# Altium PCB PCB1.PcbDoc
Units mm, origin at the board's own origin, x right, y up, seen from the top; angles counter-clockwise.
Board outline 116.84 x 100.22 mm, 2 copper layers (Top Layer, Bottom Layer); 27 components, 16 nets, 99 pads, 4 vias.
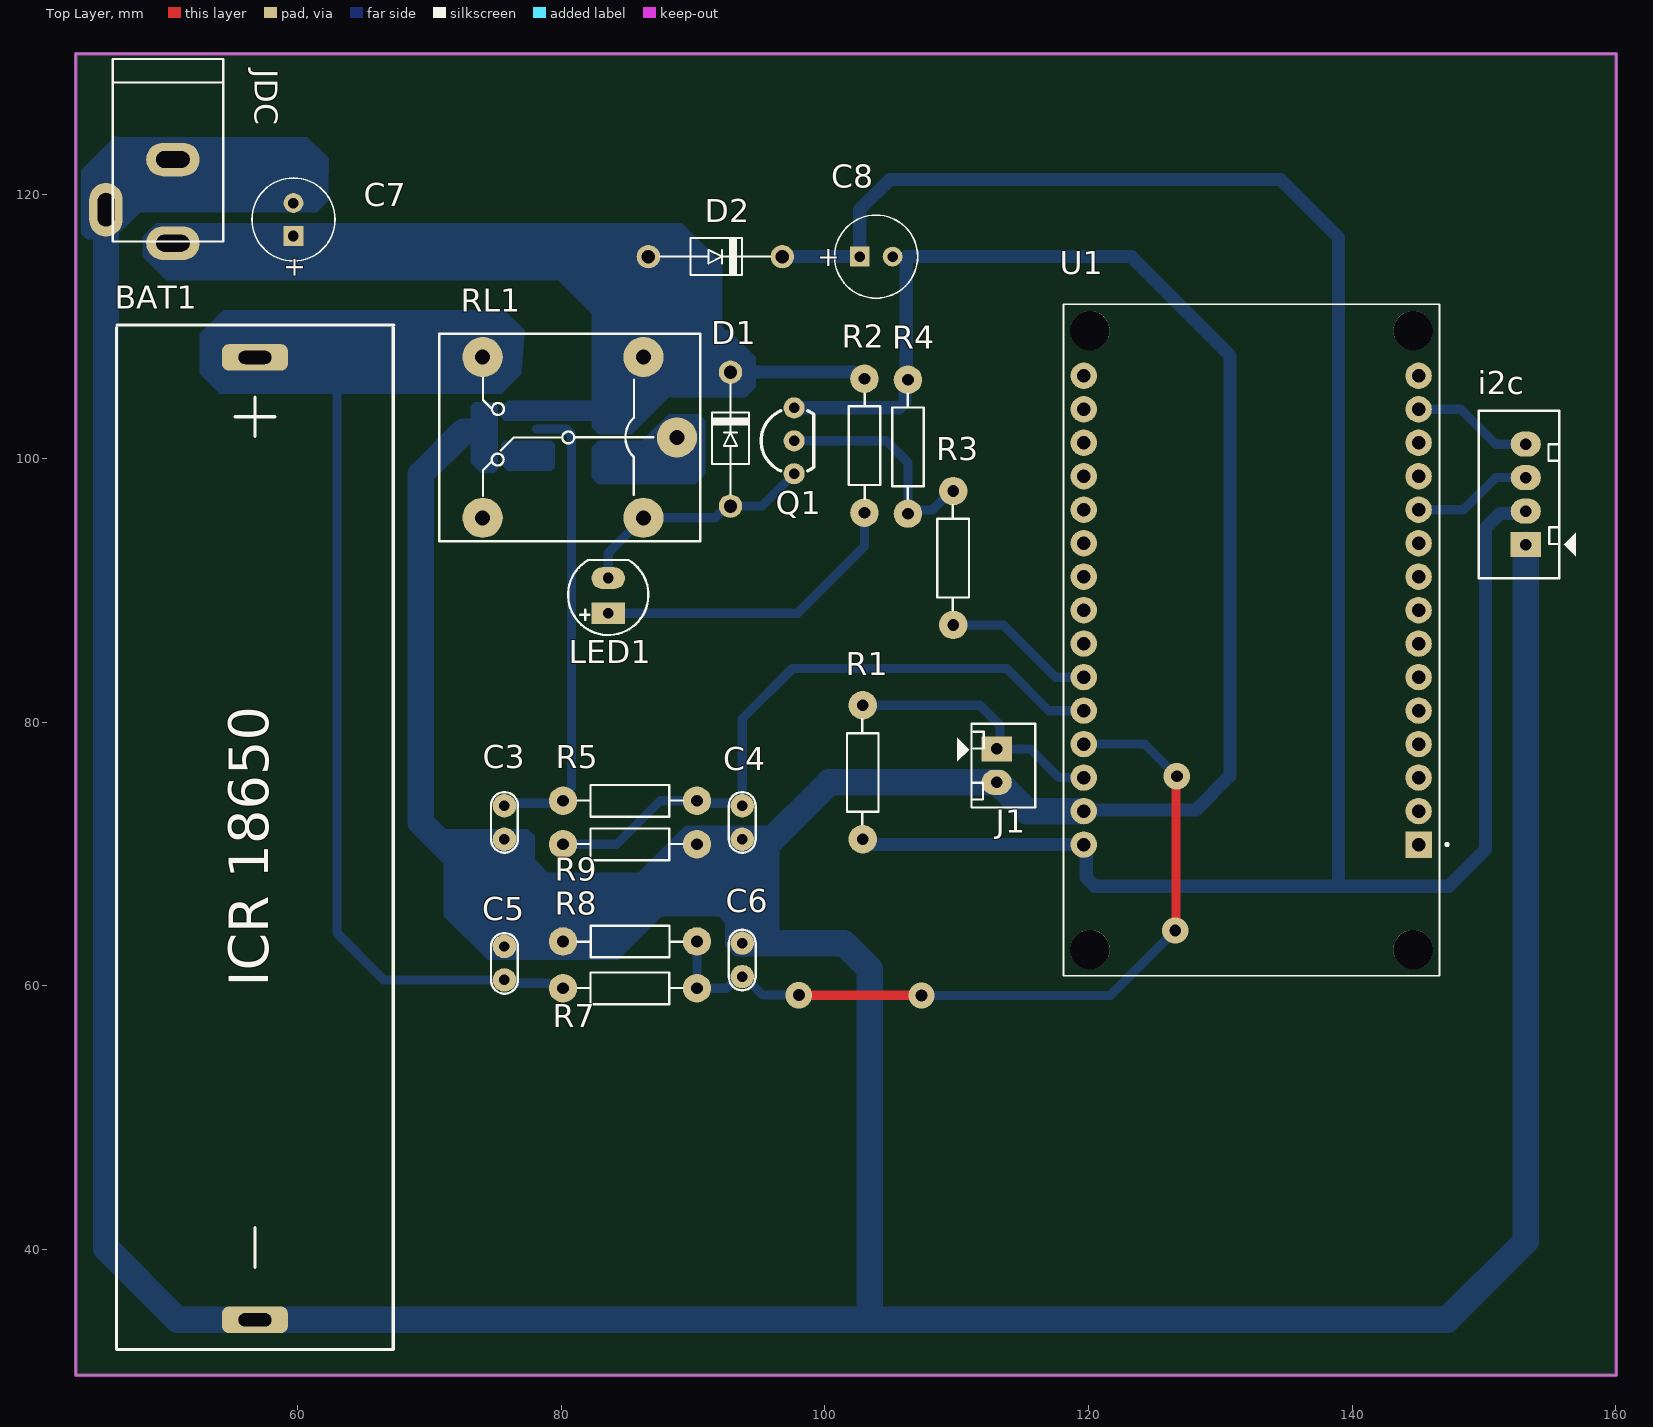
[diagram p0: Top Layer view]
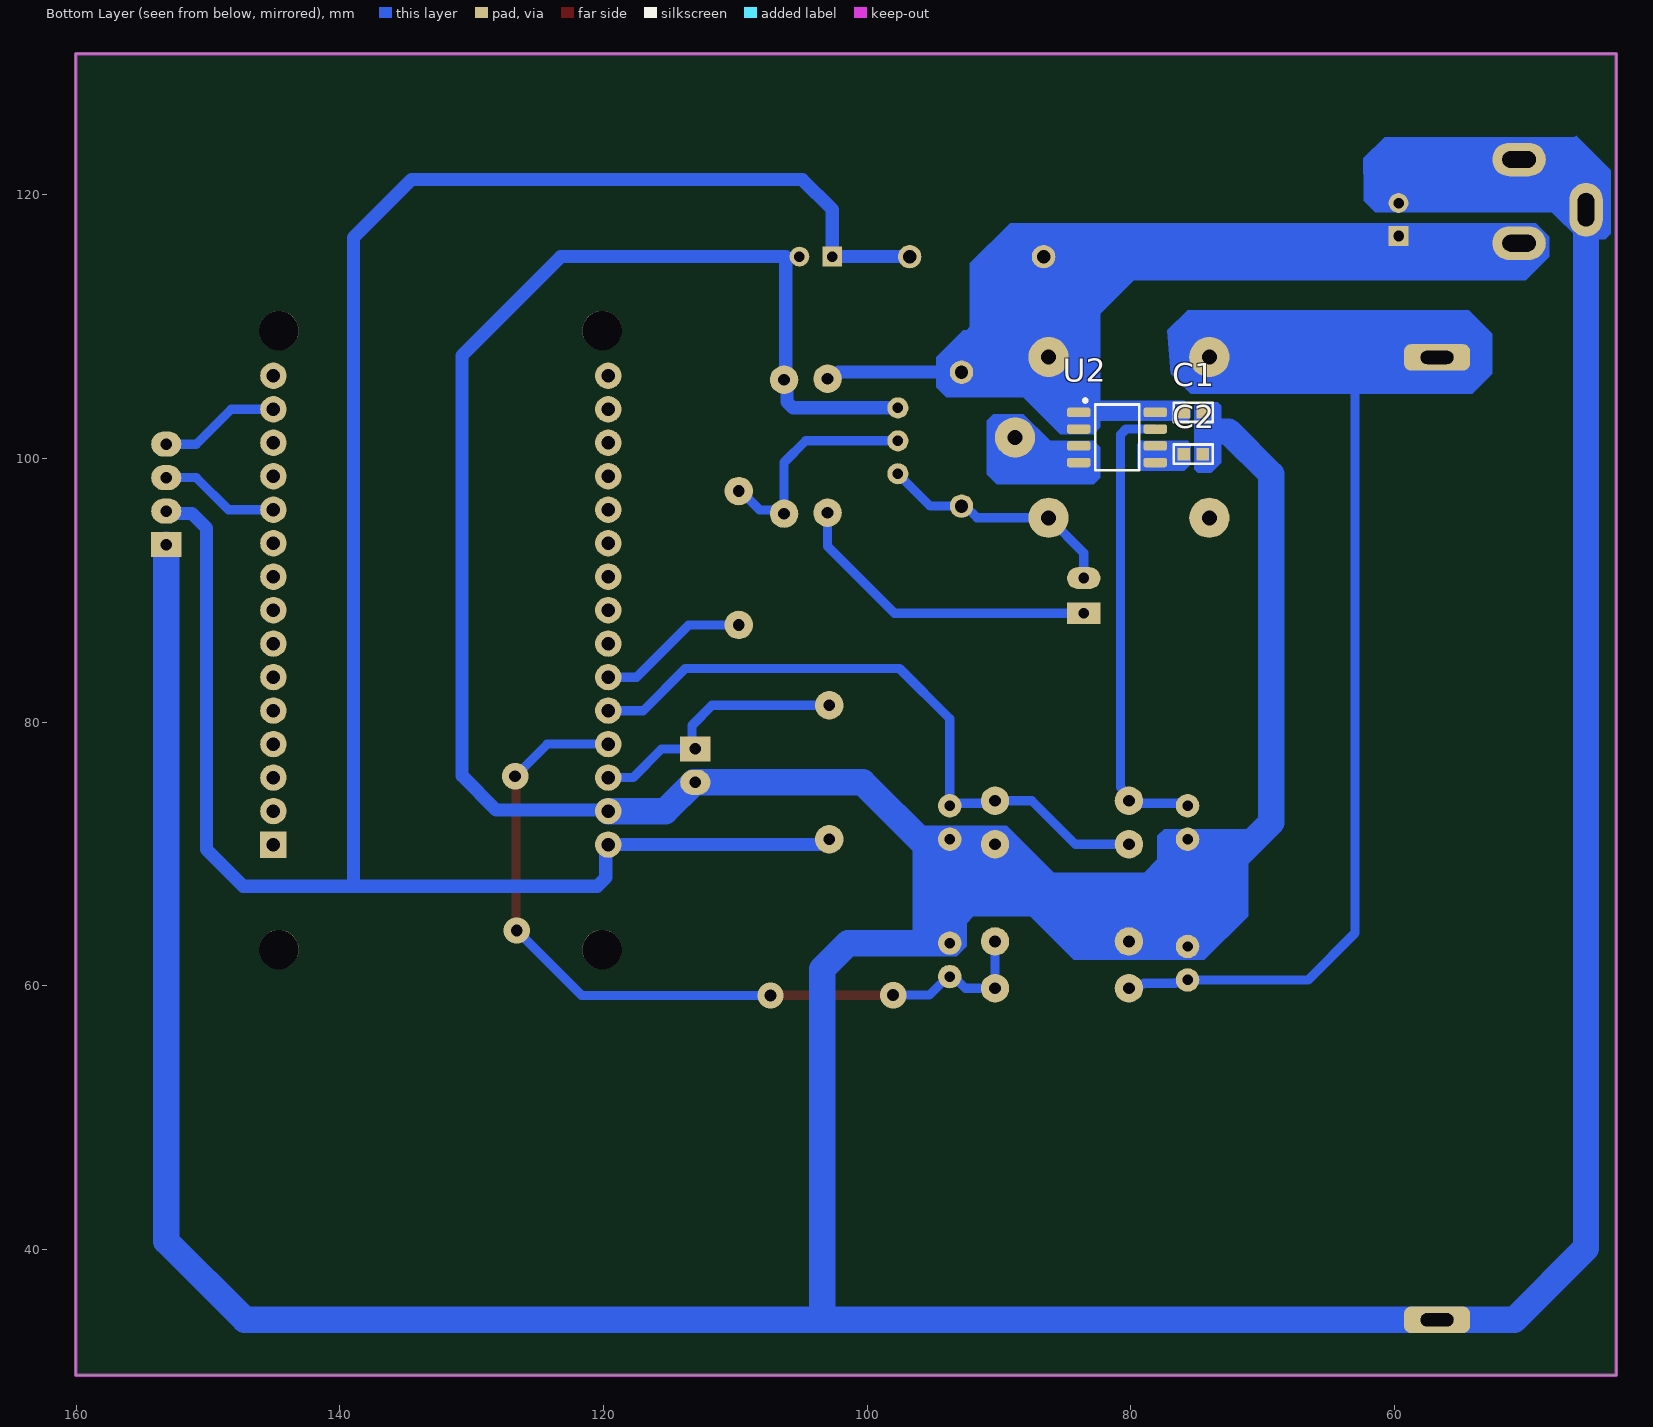
[diagram p1: Bottom Layer view, seen from below]
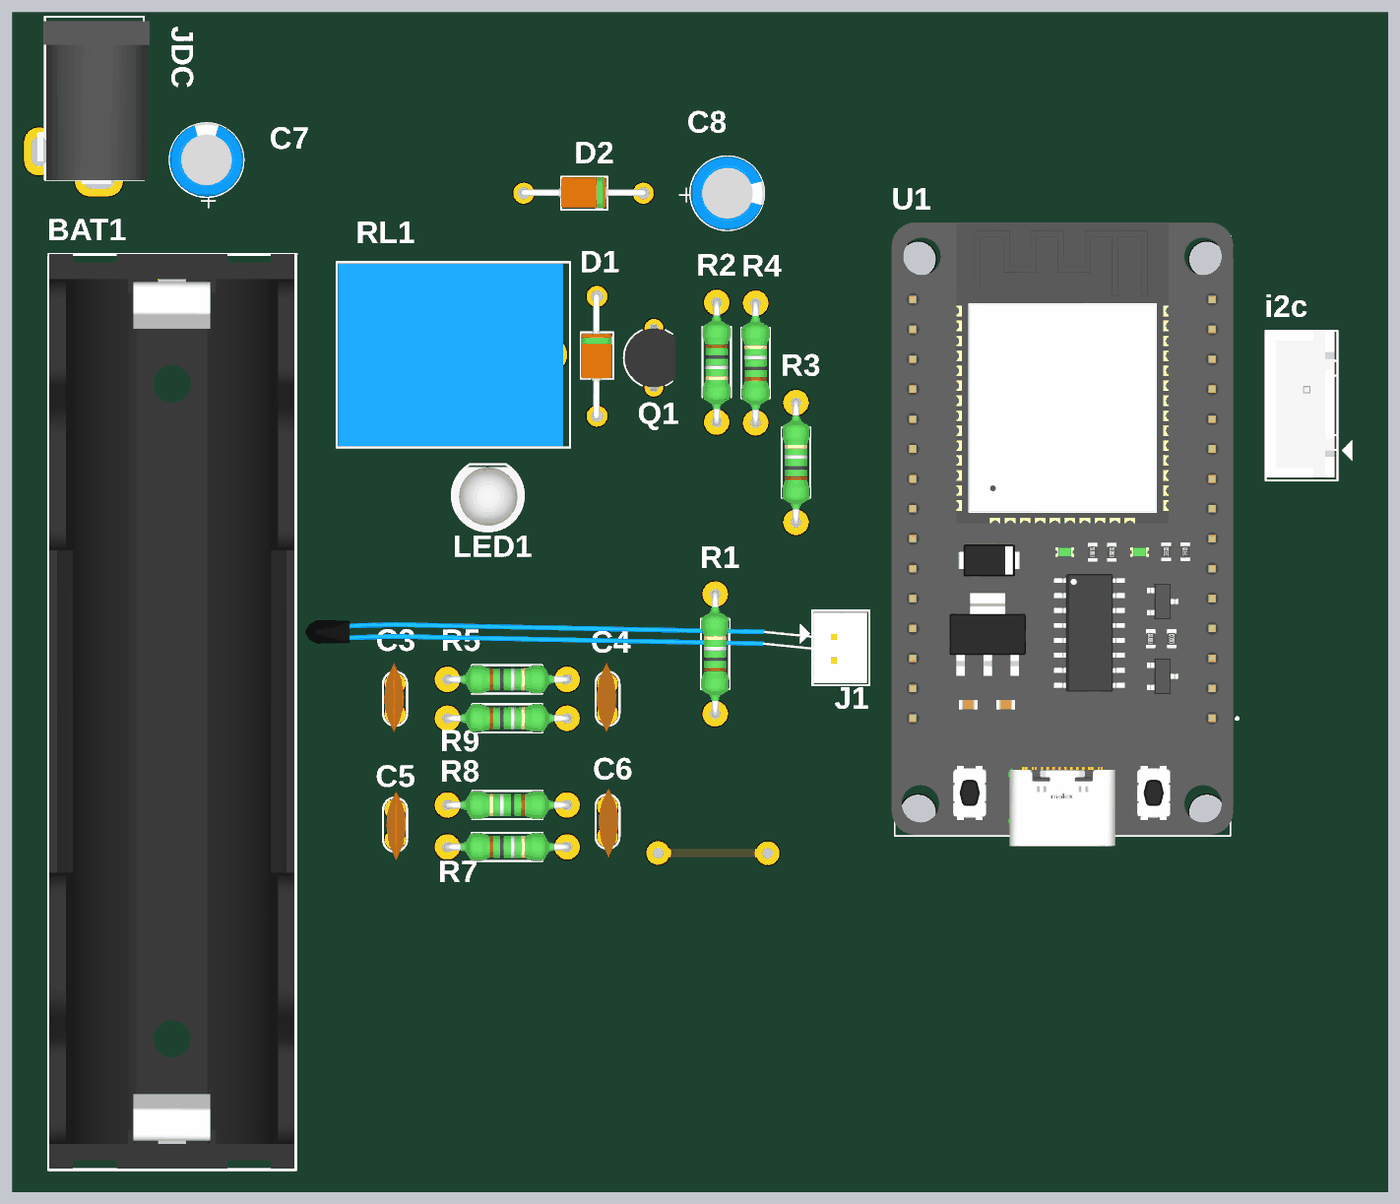
[diagram p2: 3D render of the assembled board from above, using the file's embedded part models]
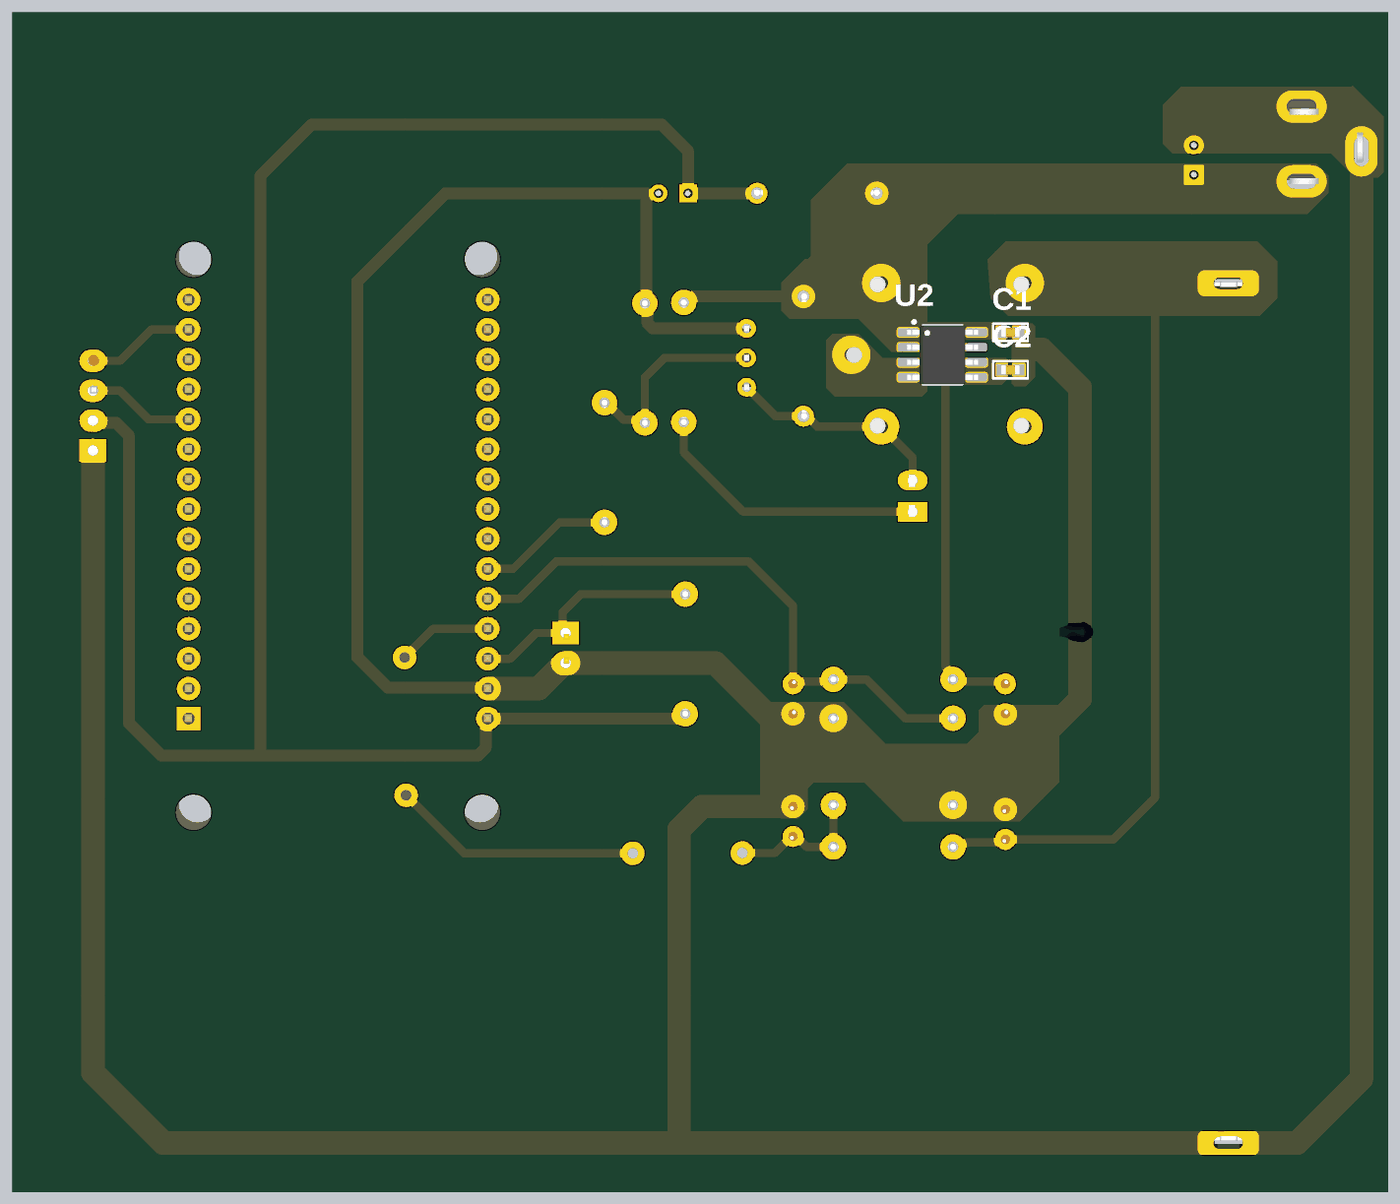
[diagram p3: 3D render of the assembled board from below, using the file's embedded part models]

## Layer stack, top to bottom
Top Solder: solder mask 0.0102, Solder Resist, Dk 3.5
Top Layer: signal copper 0.0356
Dielectric 1: dielectric 0.32, FR-4, Dk 4.8
Bottom Layer: signal copper 0.0356
Bottom Solder: solder mask 0.0102, Solder Resist, Dk 3.5

## Board outline
43.18,30.48 43.18,130.7 160.02,130.7 160.02,30.48

## Design rules (kind name [scope] priority, off if disabled: settings)
Clearance [All] p1: gap=0.254 ignorepadtopadclearanceinfootprint=FALSE except(0: Arc-Hole Track-Hole SMDPad-Hole THPad-Hole Via-Hole Fill-Hole Poly-Hole Region-Hole Text-Hole)
PolygonConnect [All] p1: connectstyle=Relief reliefconductorwidth=0.254 reliefentries=4 polygonreliefangle="90 Angle" airgapwidth=0.254
RoutingVias [All] p1: holewidth=0.711 width=1.27 viastyle="Through Hole" minholewidth=0.711 minwidth=1.27 maxholewidth=0.711 maxwidth=1.27
SolderMaskExpansion [All] p1: expansion=0.102 istentingtop=FALSE
Width [All] p1: maxlimit=2 minlimit=0.7 preferedwidth=1
30 further rules are at their usual default settings.

## Components (designator, comment, footprint, x,y, rotation, side; value= is the part's Value field where it differs from the comment)
BAT1 "SOCKET_18650" SOCKET_18650_1PIN 46.269,32.421 r0 top
C1 "0.1uF" CAPC_0603_N 75.259,103.505 r0 bottom
C2 "1nF" CAPC_0603_N 75.259,100.33 r0 bottom value=0.1uF
C3 "1uF" CN1 75.692,71.12 r90 top value=100pF
C4 "0.1uF" CN1 93.726,71.12 r90 top value=100pF
C5 "1uF" CN1 75.692,62.992 r270 top value=100pF
C6 "0.1uF" CN1 93.726,63.246 r270 top value=100pF
C7 "100uF" CA-ALU-6.3 59.69,118.13 r90 top value=104
C8 "100uF" CA-ALU-6.3 103.886,115.316 r0 top value=104
D1 "Diode" DIO-1A 92.837,96.393 r90 top value=1N5007
D2 "Diode" DIO-1A 86.614,115.316 r0 top value=1N5007
i2c "Header4" Header4 153.162,93.472 r90 top
J1 "NTC Thermistor" "NTC Thermistor" 113.03,76.708 r270 top
JDC "Jac DC" DC0 48.006,119.507 r270 top
LED1 "LED" LED-5-Green 83.566,88.392 r90 top value="LED 3 ly Single Colour"
Q1 "BC547" TO-92 97.663,101.346 r90 top
R1 "10k" RES-1/4W 102.743,75.819 r270 top
R2 "Res" RES-1/4W 103.124,101.346 r90 top
R3 "1k" RES-1/4W 109.601,92.075 r270 top
R4 "10k" RES-1/4W 106.172,100.52 r270 top
R5 "1k" RES-1/4W 84.836,74.168 r180 top
R7 "100k" RES-1/4W 84.836,59.944 r180 top
R8 "100k" RES-1/4W 85.598,63.246 r0 top
R9 "2k" RES-1/4W 84.836,70.866 r180 top
RL1 "Relay 10A/12V" "RELAY 5" 80.518,101.6 r180 top value="Relay SPDT, 10A, 12V"
U1 "ESP32-DEVKIT-V1" ESP32-DEVKIT-V1 132.08,85.852 r180 top locked
U2 "ACS712" ACS712 80.899,101.346 r180 bottom

## Footprints (in the part's own frame and the unit in brackets; to place one, negate y for a bottom-side part, rotate by r counter-clockwise, add the part's x,y. Pads: shape width x height; smd on the part's side, far side on the other; paste and mask are expansions set on the pad)
ACS712 [mm] "5A SOIC-8 Current Sensors ROHS"
  rrect50% 1.78x0.72 smd: 1(-3.048,2.154) 2(-3.048,0.889) 3(-3.048,-0.381) 4(-3.048,-1.651) 5(2.754,-1.651) 6(2.754,-0.381) 7(2.754,0.889) 8(2.754,2.159)
  silkscreen extent -2.68,-2.25 1.55,3.18, body extent -3.14,-2.25 2.89,2.75, height 1.44
CA-ALU-6.3 [mm] "Polarized capacitors, Aluminum Electrolytic Capacitors, 2-Leads, Body 6.3x15x2.5x0.5"
  rect 1.5x1.5 hole 0.8: 1(-1.25,0)
  round 1.5 hole 0.8: 2(1.25,0)
  silkscreen extent -3.15,-3.15 3.15,3.15, body extent -3.12,-3.15 3.18,3.15, height 11
CAPC_0603_N [mm]
  rrect2% 0.95x0.97 smd: 1(-0.71,0) 2(0.71,0)
  silkscreen extent -1.47,-0.74 1.47,0.74, body extent -0.8,-0.4 0.8,0.4, height 0.8
CN1 [mil]
  round 70 hole 31: 1(0,0) 2(100,0)
  silkscreen extent -40,-40 141,40, body extent -60,-30 170,37, height 265
DC0 [mil] "Jac DC input"
  oval 100x160 hole 50 slot 100 at 90 deg: 1(125,100) 2(-125,100)
  oval 160x100 hole 50 slot 100 at 0 deg: 3(25,-100)
  silkscreen extent -425,-80 120,250, body extent -410,-105 134,269, height 434
DIO-1A [mil]
  round 70 hole 40: 1(0,0) 2(400,0)
  silkscreen extent 35,-55 365,55, body extent -11,-50 411,54, height 102
ESP32-DEVKIT-V1 [mm] "ESP32-DEVKIT-V1 30Pin"
  round 2 hole 1.02: 1(12.446,-20.426) 2(12.446,-17.886) 3(12.446,-15.346) 4(12.446,-12.806) 5(12.446,-10.266) 6(12.446,-7.726) 7(12.446,-5.186) 8(12.446,-2.646) 9(12.446,-0.106) 10(12.446,2.434) 11(12.446,4.974) 12(12.446,7.514) 13(12.446,10.054) 14(12.446,12.594) 15(12.446,15.134) 17(-12.954,12.594) 18(-12.954,10.054) 19(-12.954,7.514) 20(-12.954,4.974) 21(-12.954,2.434) 22(-12.954,-0.106) 23(-12.954,-2.646) 24(-12.954,-5.186) 25(-12.954,-7.726) 26(-12.954,-10.266) 27(-12.954,-12.806) 28(-12.954,-15.346) 29(-12.954,-17.886) 30(-12.954,-20.426)
  rect 2x2 / inner round 2 / far side rect 2x2 hole 1.02: 16(-12.954,15.134)
  round 3 hole 3 unplated: ""(-12.534,23.094) ""(-12.534,-23.856) ""(11.976,23.094) ""(11.976,-23.856)
  silkscreen extent -15.2,-25.86 13.98,25.09, body extent -14.78,-26.99 14.22,25.97, height 7.86
Header4 [mil] "CON4"
  rect 75x90 hole 34: 1(0,0)
  oval 75x90 hole 34: 2(100,0) 3(200,0) 4(300,0)
  silkscreen extent -100,-150 400,140, body extent -90,-90 398,136, height 276
LED-5-Green [mil] "LED 2 PIN, 5 ly , Only colour,pin to pin 100mil"
  rect 65x100 hole 32: 1(-5,0)
  oval 65x100 hole 32: 2(100,0)
  silkscreen extent -70,-120 154,120, body extent -69,-120 145,117, height 339
"NTC Thermistor" [mil] "NTC Thermistor"
  rect 75x90 hole 34: 1(-50,0)
  oval 75x90 hole 34: 2(50,0)
  silkscreen extent -125,-118 125,115, body extent -118,-1771 118,107, height 236
"RELAY 5" [mil] "Reley DPDT, 8 pin, 1A, W400mil, L800mil,H 300mil"
  round 120 hole 45: 1(-325,0) 2(255,240) 3(255,-240) 4(-225,-240) 5(-225,240)
  silkscreen extent -395,-310 385,310, body extent -371,-304 381,306, height 602
RES-1/4W [mil]
  round 85 hole 35: 1(-215,5) 2(185,5)
  silkscreen extent -173,-42 141,52, body extent -227,-42 197,52, height 95
SOCKET_18650_1PIN [mm]
  rrect50% 5x2 hole 1 slot 2.5 at 0 deg: 1(10.5,75.25) 2(10.5,2.25)
  silkscreen extent 0,0 21.04,77.71, body extent 0.08,0.07 20.88,77.73, height 21.65
TO-92 [mm]
  round 1.6 hole 0.8 mask+0.1: 1(-2.5,0) 2(0,0) 3(2.5,0)
  silkscreen extent -2.28,-1.5 2.28,2.5, body extent -2.75,-1.86 2.75,2.5, height 9.2

## Part data
BAT1: library part SOCKET_18650_1PIN
C1 C2: library part C0603X7R104K500NT, "CAP CER 0.1UF 50V X7R 0603", Detailed Value="0.1uF - 50V - 0603", Manufacture=Hottech, Category=Capacitor, Creator=ThangND, Mounting type=SMD, PartNumber=C0603X7R104K500NT, PROJECT=KHO
C3 C4 C5 C6: library part CN1, "Cap np  1pF - 472pF"
C7 C8: library part CN-ALU-DIP, "Capacitor (Semiconductor SIM Model)", LatestRevisionDate=17-Jul-2002, LatestRevisionNote="Re-released for DXP Platform.", PackageReference=C1206, Publisher="Altium Limited"
D1 D2: "Default Diode", Code - JEDEC=DO-214-AB, Published=8-Jun-2000, Publisher="Altium Limited", Revision="July-2002: Re-released for DXP Platform."
i2c: "Header IDC, 4 x 1 Pin Vertical 2.54mm Pitch (Non-Boxed, Male)", Manufacturer="W¨¹rth Elektronik eiSos GmbH", partNo=613002143121, ComponentLink1 Description=Manufacturer, ComponentLink1URL=http://www.we-online.com, ComponentLink2 Description=Datasheet, ComponentLink2URL=http://katalog.we-online.de/em/datasheet/6130xx143121.pdf, Created by="Karrer Zheng", Created Date="29 March 2013", NoPins=02
JDC: library part DCIN, "Jac DC input"
LED1: "LED Single colour Green and Red"
Q1: "Transistors - BJT NPN 45V 100mA", DataSheet=https://www.mouser.vn/datasheet/2/308/1/BC550_D-2310266.pdf
R1 R3 R4 R5 R7 R8 R9: library part Res, "Res", Manufacturer="Generic Components", Class=Passive, Published=08/06/2000, Publisher="Altium Hobart Technology Centre", SubClass=R
R2: Manufacturer="Generic Components", Class=Passive, Published=08/06/2000, Publisher="Altium Hobart Technology Centre", SubClass=R
RL1: library part "Relay 5", "Relay SPDT,10A - 12VDC 5 Pin"
U1: "ESP32-DEVKIT-V1 30Pin"
U2: "5A SOIC-8 Current Sensors ROHS"

## Via types
v1: diameter 2, hole 0.9, Top Layer to Bottom Layer, 4 vias

## Nets (pads, with @x,y where several pads share a name; then routed paths per layer and width w, separated by ;. In a path a pad name is that pad's centre, name@x,y a point inside that pad or via, vN(x,y) a via of type N, cw(c..) or ccw(c..) an arc to the next point about the centre after c; other vN are vias at no path point)
+5: C8.1 D2.2 i2c.2 R1.2 U1.15 | length 176.9
  Bottom Layer w1: D2.2 C8.1 102.636,118.892 104.902,121.158 134.567,121.158 138.95,116.775 138.95,67.564 ; R1.2 103.184,71.12 103.586,70.718 U1.15 119.82,70.532 119.82,68.218 120.474,67.564 138.95,67.564 ; i2c.2 152.989,95.839 151.211,95.839 150.114,94.742 150.114,70.358 147.32,67.564 138.95,67.564
ADC_Ampe: C4.2 R5.1 R9.2 U1.11 | length 50.5
  Bottom Layer w0.7: R9.2 84.201,70.739 87.503,74.041 R5.1 90.487,73.85 93.535,73.85 C4.2 93.726,80.264 97.536,84.074 113.792,84.074 116.988,80.878 U1.11
ADC_PIN: C6.2 R7.1 R8.2 U1.12 | length 62.7
  Top Layer w0.7: v1(98.025,59.3) 98.038,59.288 107.312,59.288 v1(107.325,59.275) ; v1(126.575,64.2) 126.637,64.263 126.637,75.837 v1(126.7,75.9)
  Bottom Layer w0.7: R8.2 R7.1 92.545,59.817 93.434,60.706 C6.2 93.874,60.706 95.28,59.3 v1(98.025,59.3) ; v1(107.325,59.275) 121.65,59.275 v1(126.575,64.2) ; U1.12 124.262,78.338 v1(126.7,75.9)
GND: BAT1.2 C1.1 C2.1 C3.1 C4.1 C5.1 C6.1 C7.2 C8.2 i2c.1 J1.2 JDC.2 JDC.3 Q1.3 R4.1 R8.1 R9.1 U1.14 | length 443.3
  Bottom Layer w0.7: R9.1 93.053,70.739 93.434,71.12 C4.1
  Bottom Layer w1: Q1.3 105.624,103.846 106.077,104.299 106.077,105.76 R4.1 106.172,106.108 106.172,115.316 123.234,115.316 130.725,107.825 130.725,75.925 128.138,73.338 119.714,73.338 U1.14
  Bottom Layer w2: JDC.3 45.466,40.109 50.904,34.671 BAT1.2 103.4,34.671 ; 73.991,67.741 69.342,72.39 69.342,98.806 72.591,102.055 74.043,102.055 ; C6.1 101.429,63.246 103.4,61.275 103.4,34.671 ; 94.488,70.612 95.504,70.612 100.33,75.438 J1.2 113.125,75.438 115.305,73.258 U1.14 ; i2c.1 153.162,40.637 147.196,34.671 103.4,34.671
NetC2_2: C2.2 U2.5 U2.6
NetD1_1: D1.1 LED1.2 Q1.1 RL1.5 | length 18.5
  Bottom Layer w0.7: LED1.2 83.566,92.837 RL1.5 91.656,95.504 92.545,96.393 D1.1 95.21,96.393 Q1.1
NetJ1_1: J1.1 R1.1 U1.13 | length 20.4
  Bottom Layer w0.7: R1.1 111.76,81.28 113.284,79.756 113.284,78.232 J1.1 113.284,77.978 115.57,77.978 117.75,75.798 U1.13
NetLED1_1: LED1.1 R2.1 | length 24.1
  Bottom Layer w0.7: LED1.1 97.917,88.265 102.997,93.345 R2.1
NetQ1_2: Q1.2 R3.1 R4.2 | length 17.3
  Bottom Layer w0.7: Q1.2 104.648,101.346 106.299,99.695 R4.2 106.578,96.101 108.152,96.101 109.587,97.536 R3.1
NetRL1_1: RL1.1 U2.3 U2.4
Out_put_AP: C3.2 R5.2 U2.7 | length 35.4
  Bottom Layer w0.7: C3.2 75.882,73.85 79.947,73.85 R5.2 80.137,74.436 80.772,75.071 80.772,101.825 80.362,102.235 U2.7
SCL: i2c.4 U1.29 | length 9.2
  Bottom Layer w0.7: U1.29 148.23,103.738 150.876,101.092 i2c.4
SDA: i2c.3 U1.26 | length 9.1
  Bottom Layer w0.7: U1.26 148.442,96.118 150.876,98.552 i2c.3
V_PIN: BAT1.1 C5.2 R7.2 RL1.3 | length 61.6
  Bottom Layer w0.7: 62.992,106.728 62.992,64.008 66.548,60.452 C5.2 75.898,60.246 76.593,60.246 76.641,60.198 78.997,60.198 79.099,60.096 79.858,60.096 R7.2
VCC: C1.2 C7.1 D1.2 D2.1 JDC.1 R2.2 RL1.4 U2.1 U2.2 U2.8 | length 10.4
  Bottom Layer w1: D1.2 102.175,106.553 102.683,106.045 R2.2
Vo_Pin: R3.2 U1.10 | length 11.5
  Bottom Layer w0.7: R3.2 113.538,87.376 117.496,83.418 U1.10
pads on no net: RL1.2 U1. U1.1 U1.2 U1.3 U1.4 U1.5 U1.6 U1.7 U1.8 U1.9 U1.16 U1.17 U1.18 U1.19 U1.20 U1.21 U1.22 U1.23 U1.24 U1.25 U1.27 U1.28 U1.30

## Keep-outs
Keep-Out Layer:
  the board outline again, w0.254

## Other copper
Bottom Layer:
  region net GND: 62.325,120.4 62.325,119.55 61.45,118.675 48.05,118.675 46,116.625 44,116.625 43.575,117.05 43.575,121.85 46.225,124.5 46.35,124.375 60.75,124.375 62.35,122.775
  region net VCC: 48.26,116.84 48.26,115.316 50.038,113.538 79.756,113.538 82.296,110.998 82.296,108.966 91.694,108.966 92.456,109.728 92.202,109.982 92.202,114.808 89.154,117.856 49.276,117.856
  region net GND: 75.184,104.013 74.93,104.267 73.406,104.267 73.152,104.013 73.152,99.695 73.914,98.933 74.93,98.933 75.184,99.187
  region net GND: 71.1,71.882 71.1,65.298 74.422,61.976 84.328,61.976 87.63,65.278 91.948,65.278 92.456,64.77 92.456,62.992 93.218,62.23 94.742,62.23 96.52,64.008 96.52,71.628 96.012,72.136 89.408,72.136 85.852,68.58 78.994,68.58 77.978,69.596 77.978,71.374 77.47,71.882
  region net VCC: 75.946,104.394 75.438,103.886 75.438,103.124 75.692,102.87 83.82,102.87 83.82,104.394
  region net NetC2_2: 79.502,101.092 79.248,101.346 75.692,101.346 75.438,101.092 75.438,99.568 75.946,99.06 79.248,99.06 79.502,99.314
  region net NetRL1_1: 82.804,101.346 82.296,100.838 82.296,98.552 82.804,98.044 90.17,98.044 90.932,98.806 90.932,102.87 90.424,103.378 88.138,103.378 86.106,101.346 85.344,101.346
  region net V_PIN: 76.962,106.426 75.438,104.902 54.102,104.902 52.578,106.426 52.578,109.474 54.356,111.252 75.692,111.252 77.216,109.728
  region net VCC: 82.296,102.362 82.804,101.854 85.344,101.854 88.138,104.648 93.98,104.648 94.742,105.41 94.742,107.696 92.71,109.728 83.058,109.728 82.296,108.966

## Text inside footprints (layer, text, board x,y; h text height)
BAT1: Top Overlay "ICR 18650" at 57.769,59.925 h3 r90
C7: Top Overlay "+" at 60.427,113.655 h1.5 r90
C8: Top Overlay "+" at 99.411,114.579 h1.5